# Altium PCB Comparator_5.PcbDoc
Units mm, origin at the board's own origin, x right, y up, seen from the top; angles counter-clockwise.
Board outline 25.4 x 22.99 mm, 2 copper layers (Top Layer, Bottom Layer); 8 components, 8 nets, 29 pads, 0 vias.
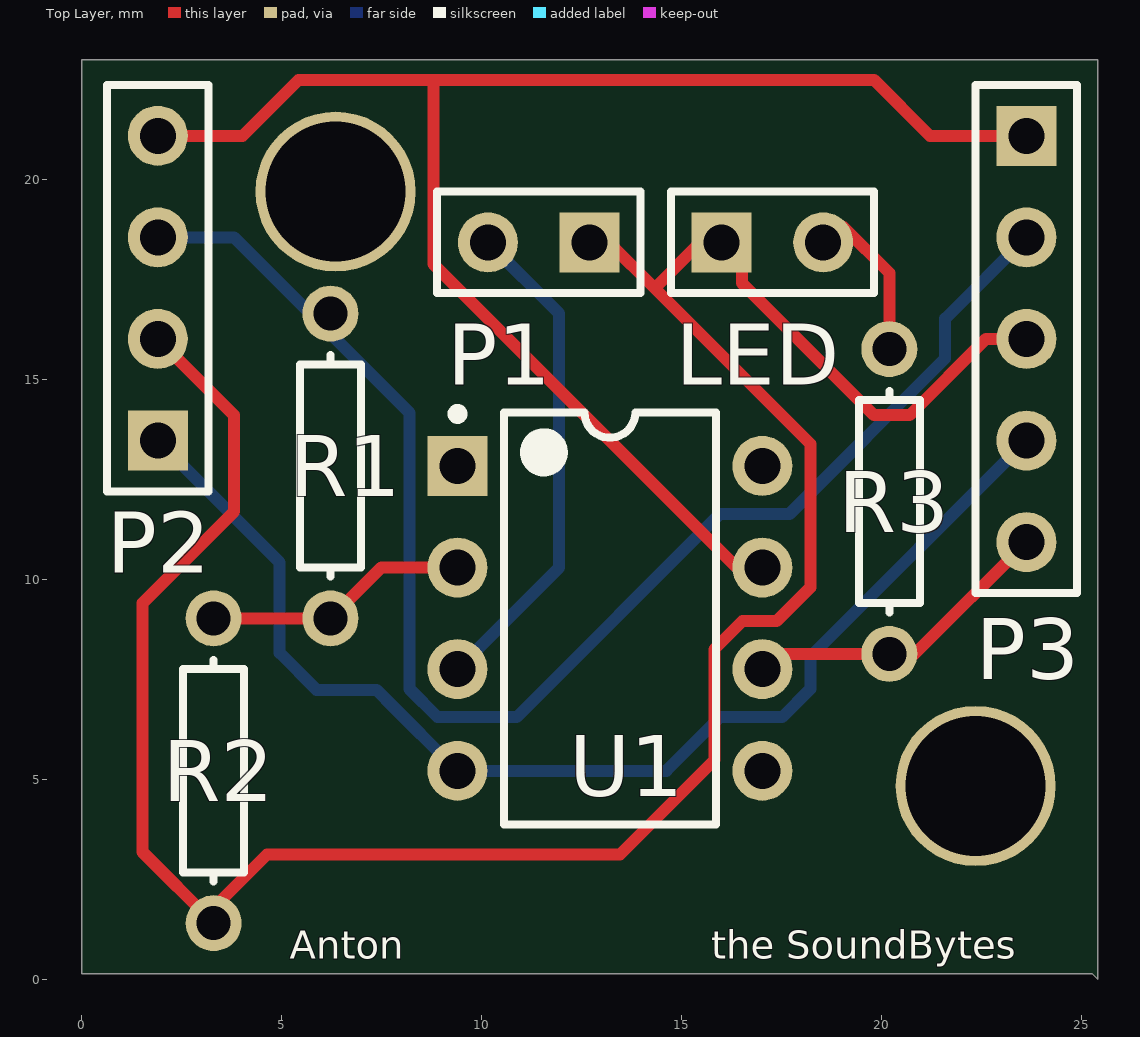
[diagram p0: Top Layer view]
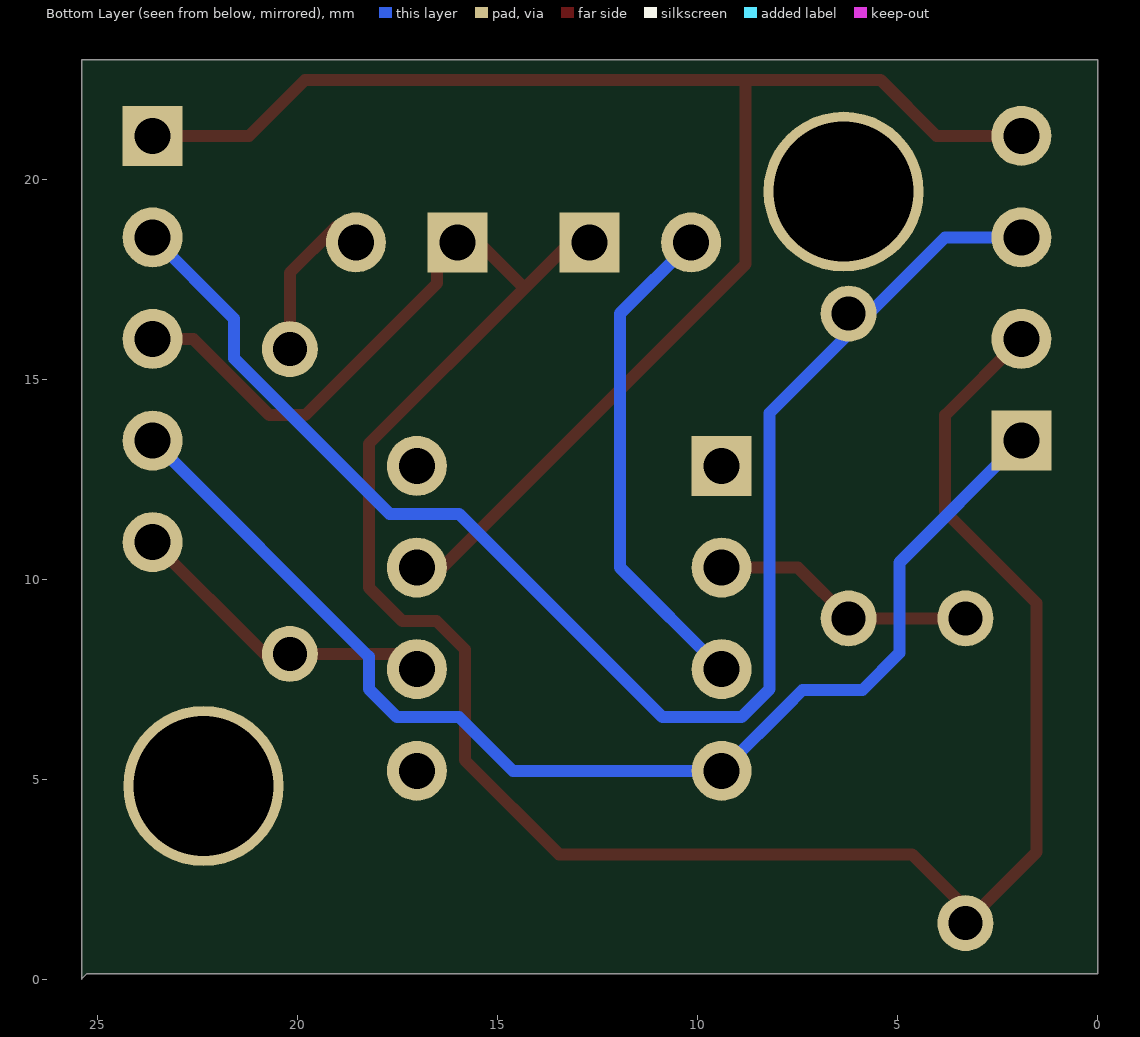
[diagram p1: Bottom Layer view, seen from below]

## Layer stack, top to bottom
Top Solder: solder mask 0.0102, Solder Resist, Dk 3.5
Top Layer: signal copper 0.0356
Dielectric 1: dielectric 0.32, FR-4, Dk 4.8
Bottom Layer: signal copper 0.0356
Bottom Solder: solder mask 0.0102, Solder Resist, Dk 3.5

## Board outline
0,22.987 25.4,22.987 25.4,0 25.273,0.127 0,0.127

## Design rules (kind name [scope] priority, off if disabled: settings)
Clearance [All] p1: gap=0.3
PolygonConnect [All] p1: connectstyle=Relief reliefconductorwidth=0.254 reliefentries=4 polygonreliefangle="90 Angle" airgapwidth=0.254
RoutingVias [All] p1: holewidth=0.711 width=1.27 viastyle="Through Hole" minholewidth=0.711 minwidth=1.27 maxholewidth=0.711 maxwidth=1.27
SolderMaskExpansion [All] p1: expansion=0.102
Width [All] p1: maxlimit=0.3 minlimit=0.25 preferedwidth=0.3
30 further rules are at their usual default settings.

## Components (designator, comment, footprint, x,y, rotation, side; value= is the part's Value field where it differs from the comment)
LED "Header 2" HDR1X2 16.002,18.415 r0 top
P1 "Header 2" HDR1X2 12.7,18.415 r180 top
P2 "Header 4" HDR1X4 1.905,13.462 r90 top
P3 "Header 5" HDR1X5 23.622,21.082 r270 top
R1 "R1" AXIAL-0.3 6.223,12.827 r90 top
R2 "R2" AXIAL-0.3 3.302,5.207 r90 top
R3 "R3" AXIAL-0.3 20.193,11.938 r270 top
U1 "LM741CN" N08E 13.208,9.017 r0 top

## Footprints (in the part's own frame and the unit in brackets; to place one, negate y for a bottom-side part, rotate by r counter-clockwise, add the part's x,y. Pads: shape width x height; smd on the part's side, far side on the other; paste and mask are expansions set on the pad)
AXIAL-0.3 [mm] "Axial Device, Thru-Hole; 2 Leads; 0.3 in Pin Spacing"
  round 1.4 hole 0.85: 1(-3.81,0) 2(3.81,0)
  silkscreen extent -2.77,-0.76 2.77,0.76
HDR1X2 [mm] "Connector; Header; 2 Position"
  rect 1.5x1.5 hole 0.9: 1(0,0)
  round 1.5 hole 0.9: 2(2.54,0)
  silkscreen extent -1.27,-1.27 3.81,1.27
HDR1X4 [mm] "Connector; Header; 4 Position"
  rect 1.5x1.5 hole 0.9: 1(0,0)
  round 1.5 hole 0.9: 2(2.54,0) 3(5.08,0) 4(7.62,0)
  silkscreen extent -1.27,-1.27 8.89,1.27
HDR1X5 [mm] "Connector; Header; 5 Position"
  rect 1.5x1.5 hole 0.9: 1(0,0)
  round 1.5 hole 0.9: 2(2.54,0) 3(5.08,0) 4(7.62,0) 5(10.16,0)
  silkscreen extent -1.27,-1.27 11.43,1.27
N08E [mm] "DIP, 8-Leads, Row Spacing 7.62mm, Pitch 2.54mm, Body 9.91x6.35mm"
  rect 1.5x1.5 hole 0.9: 1(-3.81,3.81)
  round 1.5 hole 0.9: 2(-3.81,1.27) 3(-3.81,-1.27) 4(-3.81,-3.81) 5(3.81,-3.81) 6(3.81,-1.27) 7(3.81,1.27) 8(3.81,3.81)
  silkscreen extent -3.93,-5.15 2.65,5.23, body extent -3.6,-5.15 3.6,5.15, height 5.34

## Part data
LED P1: "Header, 2-Pin"
P2: "Header, 4-Pin"
P3: "Header, 5-Pin"
R1 R2 R3: library part Res1, "Resistor"
U1: "Operational Amplifier, 8-pin MDIP"

## Free pads (board coordinates)
  round 4 hole 3.5: 3(22.352,4.826) 4(6.35,19.685)

## Nets (pads, with @x,y where several pads share a name; then routed paths per layer and width w, separated by ;. In a path a pad name is that pad's centre, name@x,y a point inside that pad or via, vN(x,y) a via of type N, cw(c..) or ccw(c..) an arc to the next point about the centre after c; other vN are vias at no path point)
NetLED_1: LED.1 P1.1 P2.2 P3.3 R2.1 | length 61.6
  Top Layer w0.3: P2.2 3.81,14.097 3.81,11.684 1.524,9.398 1.524,3.175 R2.1 3.302,1.779 4.64,3.117 13.463,3.117 15.818,5.472 15.818,8.244 16.521,8.947 17.375,8.947 18.218,9.79 18.218,13.381 14.327,17.272 ; P1.1 13.184,18.415 14.327,17.272 ; LED.1 15.47,18.415 14.327,17.272 ; LED.1@16.256,18.796 16.51,18.796 16.51,17.399 19.812,14.097 20.701,14.097 22.606,16.002 P3.3
NetLED_2: LED.2 R3.1 | length 3.8
  Top Layer w0.3: LED.2@19.05,18.168 19.05,18.796 20.193,17.653 R3.1@20.193,16.129
NetP1_2: P1.2 U1.3 | length 12.5
  Bottom Layer w0.3: U1.3 11.938,10.287 11.938,16.637 P1.2
NetP2_1: P2.1 P3.4 U1.4 | length 30.4
  Bottom Layer w0.3: P2.1 4.953,10.414 4.953,8.153 5.874,7.232 7.373,7.232 7.598,7.007 7.598,7.001 9.392,5.207 U1.4 14.618,5.207 15.958,6.547 17.515,6.547 18.218,7.25 18.218,8.058 P3.4
NetP2_3: P2.3 P3.2 R1.2 | length 36.3
  Bottom Layer w0.3: P2.3 3.81,18.542 8.198,14.154 8.198,7.25 8.901,6.547 10.878,6.547 15.958,11.627 17.698,11.627 21.59,15.519 21.59,16.51 P3.2
NetP2_4: P2.4 P3.1 U1.7 | length 38.9
  Top Layer w0.3: P2.4 4.028,21.082 5.425,22.479 8.763,22.479 ; U1.7 16.383,10.287 8.8,17.87 8.8,22.442 8.763,22.479 ; P3.1 21.209,21.082 19.812,22.479 8.763,22.479
NetP3_5: P3.5 R3.2 U1.6 | length 8.2
  Top Layer w0.3: U1.6 17.399,8.128 R3.2 20.828,8.128 P3.5 P3.5@23.622,10.668
NetR1_1: R1.1 R2.2 U1.2 | length 6.6
  Top Layer w0.3: R2.2 R1.1 7.493,10.287 U1.2
pads on no net: U1.1 U1.5 U1.8

## Silkscreen, mask and mechanical layers (free items; w line width, h text height)
Top Overlay:
  text "Anton" at 5.207,0.508 h0.7
  text "the SoundBytes" at 15.748,0.508 h0.7